# EAGLE board Thetis_RevD2_PCB (EAGLE 9.7.0)
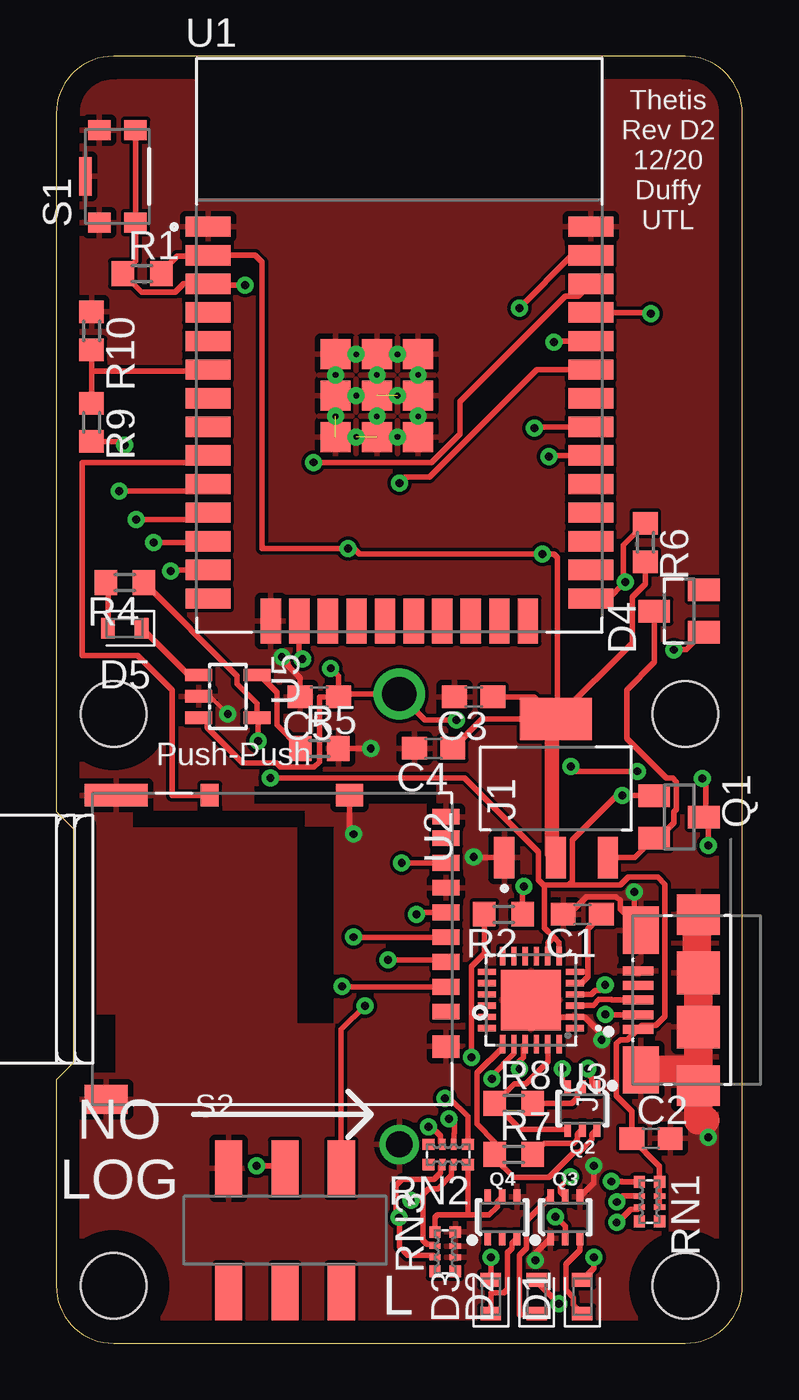
[diagram p0: board, top side]
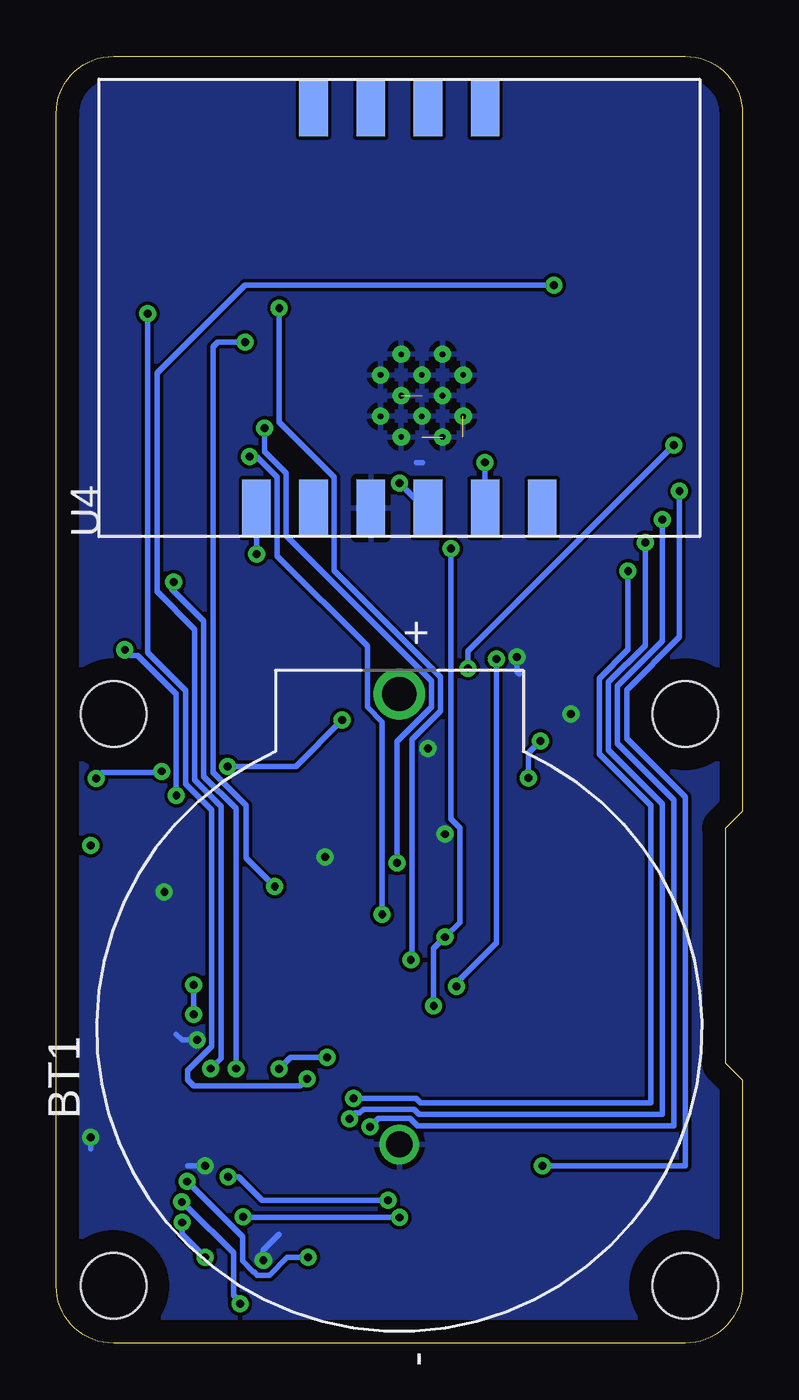
[diagram p1: board, bottom side, seen from below]

Size 30.48 x 57.15 mm. Coordinates in mm from the lower left corner, seen from the top.
Outline: 0,2.54 arc90 2.54,0 27.94,0 arc90 30.48,2.54 30.48,54.61 arc90 27.94,57.15 2.54,57.15 arc90 0,54.61 0,23.62 0.76,22.86 0.76,12.45 0,11.68 0,2.54
Copper layers (1*16): Top 0.035mm / dielectric 1.5mm / Bottom 0.035mm
Design rules "default": minimum track width 6mil, minimum drill 0.35mm, track to track 6mil, track to pad 6mil, pad to pad 6mil, via to via 6mil, smd to smd 6mil, copper to edge 40mil, drill to drill 6mil, minimum pad ring 10mil, minimum via ring 8mil, stop-mask expansion 4mil, vias tented up to drill 0mil, thermal gap 10mil
Net classes: 0 default: width 0.178 mm; 2 lowpower: width 0.305 mm, drill 0.483 mm
Holes 2.92 mm at 2.54,27.94 27.94,27.94 27.94,2.54 2.54,2.54
tKeepout: area 0.2,25.6 to 4.8,30.2; area 25.6,25.6 to 30.2,30.2; area 25.6,0.2 to 30.2,4.8; area 0.2,0.2 to 4.8,4.8
bKeepout: area 0.2,25.6 to 4.8,30.2; area 25.6,25.6 to 30.2,30.2; area 25.6,0.2 to 30.2,4.8; area 0.2,0.2 to 4.8,4.8

## Footprints (pad centres in the part's own frame; a part is rotated, then mirrored left to right if it is on the bottom)
BAT_BS-2450 = drill 1.52: + 14.86,0 | drill 1.17: - -5.14,0
C0603 = smd 1.1 x 1: 1 -0.85,0; 2 0.85,0
LEDC1608X65N = smd 0.612 x 0.912: A 0.75,0; C -0.75,0
SOT23 = smd 1 x 1.4: 1 -0.95,-1.1; 2 0.95,-1.1; 3 0,1.1
HRS_DM3AT-SF-PEJM5 = smd 0.7 x 1.2: 1 3.2,0; 2 2.1,0; 3 1,0; 4 -0.1,0; 5 -1.2,0; 6 -2.3,0; 7 -3.4,0; 8 -4.5,0; SWB -5.45,0 | smd 1 x 1.2: P1 -6.4,-4.3; P4 4.75,0 | smd 1 x 2.8: P2 -6.4,-14.65 | smd 1.3 x 1.9: P3 7.1,-15.1 | smd 1 x 0.8: SWA -6.4,-10.5
AMPHENOL_10118192-0001LF = smd 0.4 x 1.35: 1 -1.3,0; 2 -0.65,0; 3 0,0; 4 0.65,0; 5 1.3,0 | smd 2.1 x 1.6: SH1 -3.1,-0.125; SH2 3.1,-0.125 | smd 1.8 x 1.9: SH3 -3.8,-2.675; SH6 3.8,-2.675 | smd 1.9 x 1.9: SH4 -1.2,-2.675; SH5 1.2,-2.675
SC70-6 = smd 0.3 x 0.66: 1 -0.65,-0.92; 2 0,-0.92; 3 0.65,-0.92; 4 0.65,0.92; 5 0,0.92; 6 -0.65,0.92
R0603 = smd 1 x 1.1: 1 -0.85,0; 2 0.85,0
EXB28V = smd 0.525 x 0.5: 1 -0.875,-0.45; 4 0.875,-0.45; 5 0.875,0.45; 8 -0.875,0.45 | smd 0.25 x 0.5: 2 -0.25,-0.45; 3 0.25,-0.45; 6 0.25,0.45; 7 -0.25,0.45
SW_KMR221GLFS = smd 0.9 x 1: 1 -2.05,0.8; 2 -2.05,-0.8; 3 2.05,-0.8; 4 2.05,0.8 | smd 1.7 x 0.55: 5 0,1.425
SW_JS202011SCQN = smd 1.2 x 2.5: 1 -2.5,-2.75; 2 0,-2.75; 3 2.5,-2.75; 4 -2.5,2.75; 5 0,2.75; 6 2.5,2.75
MODULE_ESP32-WROOM-32E_(16MB) = smd 2 x 0.9: 1 -8.5,5.26; 2 -8.5,3.99; 3 -8.5,2.72; 4 -8.5,1.45; 5 -8.5,0.18; 6 -8.5,-1.09; 7 -8.5,-2.36; 8 -8.5,-3.63; 9 -8.5,-4.9; 10 -8.5,-6.17; 11 -8.5,-7.44; 12 -8.5,-8.71; 13 -8.5,-9.98; 14 -8.5,-11.25; 25 8.5,-11.25; 26 8.5,-9.98; 27 8.5,-8.71; 28 8.5,-7.44; 29 8.5,-6.17; 30 8.5,-4.9; 31 8.5,-3.63; 32 8.5,-2.36; 33 8.5,-1.09; 34 8.5,0.18; 35 8.5,1.45; 36 8.5,2.72; 37 8.5,3.99; 38 8.5,5.26 | smd 0.9 x 2: 15 -5.715,-12.25; 16 -4.445,-12.25; 17 -3.175,-12.25; 18 -1.905,-12.25; 19 -0.635,-12.25; 20 0.635,-12.25; 21 1.905,-12.25; 22 3.175,-12.25; 23 4.445,-12.25; 24 5.715,-12.25 | smd 1.33 x 1.33: 39_1 -2.835,-0.405; 39_2 -1,-0.405; 39_3 0.835,-0.405; 39_4 -2.835,-2.24; 39_5 -1,-2.24; 39_6 0.835,-2.24; 39_7 -2.835,-4.075; 39_8 -1,-4.075; 39_9 0.835,-4.075 | drill 0.25 pad 0.3: 39_10 -1.917,-0.405; 39_11 -0.083,-0.405; 39_12 -2.835,-1.323; 39_13 -1,-1.323; 39_14 0.835,-1.323; 39_15 -1.917,-2.24; 39_16 -0.083,-2.24; 39_17 -2.835,-3.158; 39_18 -1,-3.158; 39_19 0.835,-3.158; 39_20 -1.917,-4.075; 39_21 -0.083,-4.075
SOT230P700X180-4N = smd 1.86 x 0.9: 1 -3.075,2.3; 2 -3.075,0; 3 -3.075,-2.3 | smd 1.86 x 3.19: 4 3.075,0
QFN50P400X400X80-25N = smd 0.81 x 0.26: 1 -1.955,1.25; 2 -1.955,0.75; 3 -1.955,0.25; 4 -1.955,-0.25; 5 -1.955,-0.75; 6 -1.955,-1.25; 13 1.955,-1.25; 14 1.955,-0.75; 15 1.955,-0.25; 16 1.955,0.25; 17 1.955,0.75; 18 1.955,1.25 | smd 0.26 x 0.81: 7 -1.25,-1.955; 8 -0.75,-1.955; 9 -0.25,-1.955; 10 0.25,-1.955; 11 0.75,-1.955; 12 1.25,-1.955; 19 1.25,1.955; 20 0.75,1.955; 21 0.25,1.955; 22 -0.25,1.955; 23 -0.75,1.955; 24 -1.25,1.955 | smd 2.68 x 2.68: 25 0,0
ADAFRUIT-BNO055-BREAKOUT-SMD = smd 2.54 x 1.27: P$1 -8.89,6.35; P$2 -8.89,3.81; P$3 -8.89,1.27; P$4 -8.89,-1.27; P$5 -8.89,-3.81; P$6 -8.89,-6.35; P$7 8.89,3.81; P$8 8.89,1.27; P$9 8.89,-1.27; P$10 8.89,-3.81
SOT23-5L = smd 0.55 x 1.2: 1 -0.95,-1.3; 2 0,-1.3; 3 0.95,-1.3; 4 0.95,1.3; 5 -0.95,1.3

## Placement (x,y rotation side)
BT1  BS-2450  [BAT_BS-2450]  15.24,13.97 90 bottom
C1  1 uF  [C0603]  23.37,19.05 180 top
C2  1 uF  [C0603]  26.42,9.09 0 top
C3  10 uF  [C0603]  18.54,28.7 180 top
C4  10 uF  [C0603]  16.76,26.42 180 top
C5  10 uF  [C0603]  11.68,28.7 180 top
D1  GRN  [LEDC1608X65N]  23.37,2.07 90 top
D2  GRN  [LEDC1608X65N]  21.34,2.07 90 top
D3  GRN  [LEDC1608X65N]  19.3,2.07 90 top
D4  BAT400  [SOT23]  27.66,32.51 90 top
D5  ORG  [LEDC1608X65N]  3.05,31.75 180 top
J1  DM3AT-SF-PEJM5  [HRS_DM3AT-SF-PEJM5]  17.32,17.93 270 top
J2  10118192-0001LF  [AMPHENOL_10118192-0001LF]  25.84,15.24 90 top
Q1  DMG3414U-7  [SOT23]  27.66,23.37 270 top
Q2  MMBT2222N  [SC70-6]  23.37,10.41 180 top
Q3  MMBT2222N  [SC70-6]  22.61,5.59 0 top
Q4  MMBT2222N  [SC70-6]  19.81,5.59 0 top
R1  10k  [R0603]  3.81,47.5 0 top
R2  1k  [R0603]  19.86,19.05 180 top
R4  1k  [R0603]  3.05,33.78 180 top
R5  10.2k  [R0603]  11.68,26.42 0 top
R6  10k  [R0603]  26.16,35.56 270 top
R7  10k  [R0603]  20.32,8.38 0 top
R8  10k  [R0603]  20.32,10.65 0 top
R9  10k  [R0603]  1.57,40.89 270 top
R10  10k  [R0603]  1.57,44.96 270 top
RN1  1k  [EXB28V]  26.35,6.29 270 top
RN2  1k  [EXB28V]  17.41,8.38 180 top
RN3  10k  [EXB28V]  17.27,4.06 90 top
S1  KMR221GLFS  [SW_KMR221GLFS]  2.72,51.82 90 top
S2  JS202011SCQN  [SW_JS202011SCQN]  10.16,5.02 0 top
U1  ESP32-WROOM-32E_(16MB)  [MODULE_ESP32-WROOM-32E_(16MB)]  15.24,44.32 0 top
U2  AZ1117EH-5.0TRG1  [SOT230P700X180-4N]  22.2,24.64 90 top
U3  CP2104-F03-GM  [QFN50P400X400X80-25N]  21.08,15.24 180 top
U4  BNO055 Breakout  [ADAFRUIT-BNO055-BREAKOUT-SMD]  15.24,45.97 90 bottom
U5  MCP73831/OT  [SOT23-5L]  7.62,28.72 270 top

## Library data of the parts
BT1 = BS-2450; AVAILABILITY: Unavailable; DESCRIPTION: Battery Holder _Open_ Coin, 24.5mm 1 Cell PC Pin; MF: MPD; MP: BS-2450; PACKAGE: Non-Standard MPD; PRICE: None
C1-C5 = rcl; SPICEPREFIX: C
D1-D3 D5 = LED; CATEGORY: LED; COLOR: GREEN; DESCRIPTION: CHIP LED ROUND; SUB-CATEGORY: CHIP; TYPE: ROUND_TOP
D4 = diode
J1 = DM3AT-SF-PEJM5; AVAILABILITY: Unavailable; DESCRIPTION: DM3 RA SMT microSD memory card push/push; MF: Hirose; MP: DM3AT-SF-PEJM5; PACKAGE: None; PRICE: None
J2 = MicroUSB; MANUFACTURER: Amphenol; PARTREV: B; STANDARD: Manufacturer Recommendation
Q1 = Transistor; CATEGORY: Transistor; SUB-CATEGORY: MOSFET; TYPE: N-Channel
Q2-Q4 = SparkFun-DiscreteSemi-Poseidon-Edit; PROD_ID: TRANS-13337
R1 R2 R4-R10 = rcl; SPICEPREFIX: R
RN1-RN3 = resistor-dil-Poseidon-Edit; OC_FARNELL: unknown; OC_NEWARK: unknown
S1 = KMR221GLFS; MANUFACTURER: CnK
S2 = JS202011SCQN; MANUFACTURER: C&K
U1 = ESP32-WROOM-32E; MANUFACTURER: Espressif Systems; MAXIMUM_PACKAGE_HEIGHT: 3.25mm; PARTREV: 1.1; STANDARD: Manufacturer Recommendations
U2 = AZ1117EH-5.0TRG1; ARROW_ELECTRONICS-PURCHASE-URL: https://snapeda.com/shop?store=Arrow+Electronics&id=482930; AVAILABILITY: Good; DESCRIPTION: Linear Voltage Regulator IC 1 Output 1A SOT-223; DIGIKEY-PURCHASE-URL: https://snapeda.com/shop?store=DigiKey&id=482930; MF: Diodes Inc.; MOUSER-PURCHASE-URL: https://snapeda.com/shop?store=Mouser&id=482930; MP: AZ1117EH-5.0TRG1; PACKAGE: SOT-223 Diodes Inc.; PRICE: None
U3 = CP2104; MANUFACTORER: Silicon Labs; PARTREV: 1.0; STANDERD: IPC-7351B
U4 = EVE-ECAD-Library
U5 = adafruit - EVE Edit

## Nets
3.3V: C3.1 C4.1 J1.4 R1.2 R6.2 S2.6 U1.2 U2.2 U2.4 U4.P$1
3V3: U4.P$2
!DTR: Q2.4 R8.1 U3.23
!RTS: Q2.6 R7.1 U3.19
ACAL_LED: RN2.3 U1.11
BATT_MON: R9.1 R10.2 U1.6
ESP_RX: R2.1 U1.34
ESP_TX: U1.35 U3.20
GCAL_LED: RN2.2 U1.12
GND: BT1.- C1.2 C2.2 C3.2 C4.2 C5.2 J1.6 J1.P1 J1.P2 J1.P3 J1.P4 J1.SWB J2.5 J2.SH1 J2.SH2 J2.SH3 J2.SH4 J2.SH5 J2.SH6 Q3.1 Q3.4 Q4.4 R5.2 R10.1 RN3.2 RN3.3 RN3.4 S1.1 S1.4 S1.5 S2.4 U1.1 U1.15 U1.38 U1.39_1 U1.39_2 U1.39_3 U1.39_4 U1.39_5 U1.39_6 U1.39_7 U1.39_8 U1.39_9 U1.39_10 U1.39_11 U1.39_12 U1.39_13 U1.39_14 U1.39_15 U1.39_16 U1.39_17 U1.39_18 U1.39_19 U1.39_20 U1.39_21 U2.1 U3.2 U3.25 U4.P$3 U5.2
IO0: Q2.3 R6.1 U1.25
LOG_SELECT: S2.5 U1.10
MCAL_LED: RN2.1 U1.13
MISO: J1.7 U1.31
MOSI: J1.3 U1.37
N$2: C1.1 U3.5 U3.6
N$3: R2.2 U3.21
N$4: J2.3 U3.3
N$5: J2.2 U3.4
N$6: Q3.5 RN2.7 RN3.6
N$7: Q2.2 R8.2
N$8: D1.C Q3.3
N$9: Q2.5 R7.2
N$10: D1.A RN1.3
N$11: D2.A RN1.2
N$12: D2.C Q3.6
N$13: D4.3 Q1.2 U2.3
N$14: Q3.2 RN2.6 RN3.7
N$15: Q4.5 RN2.8 RN3.5
N$16: D3.C Q4.3
N$17: D3.A RN1.1
N$20: D5.A R4.2
N$21: D5.C U5.1
N$22: R5.1 U5.5
RST: Q2.1 R1.1 S1.2 S1.3 U1.3
SCK: J1.5 U1.30
SCL: U1.36 U4.P$5
SD_CD: J1.SWA U1.9
SD_CS: J1.2 U1.16
SDA: U1.33 U4.P$4
V_BATT: BT1.+ C5.1 Q1.3 R9.2 U5.3
V_USB: C2.1 D4.1 J2.1 Q1.1 R4.1 RN1.6 RN1.7 RN1.8 U3.7 U3.8 U5.4

## Tracks (layer width: path | path; a pad name or v marks a point on that pad's centre or on a via)
3.3V  (via drill 0.35)
  Top 0.254: R1.2 4.66,47.57 5.37,48.28 6.71,48.28 U1.2 8.84,48.31 9.14,48.01 9.14,35.28 v12.95,35.28 12.95,35.56 13.46,35.05 v21.59,35.05 22.1,35.05 22.26,34.89 22.26,27.78 | R6.2 26.16,33.7 25.59,33.13 25.59,31.1 22.26,27.78 | 22.26,27.78 U2.4 | C3.1 21.21,28.7 U2.4 | C4.1 18.91,27.71 U2.4 | J1.4 v13.21,18.03 | S2.6 12.66,13.93 v13.72,14.99
  Top 0.635: U2.4 22.02,27.53 22.02,21.75 U2.2
  Bottom 0.254: U4.P$1 v21.59,35.05 | v13.72,14.99 13.72,17.53 v13.21,18.03 12.55,18.69 12.55,22.88 12.95,23.28 v12.95,35.28
!DTR
  Top 0.254: Q2.4 20.63,9.49 R8.1 20.34,11.53 20.86,11.53 21.83,12.5 U3.23
!RTS
  Top 0.254: Q2.6 23.8,9.27 23.8,9.05 23.23,8.48 23,8.48 21.89,7.37 20.32,7.37 19.47,8.22 R7.1 19.47,8.95 18.69,9.73 18.69,12 19.83,13.15 U3.19
ACAL_LED  (via drill 0.35)
  Top 0.254: RN2.3 17.07,8.91 17.07,9.2 16.66,9.61 v16.54,9.61 | U1.11 6.43,36.58 v3.56,36.58
  Bottom 0.254: v3.56,36.58 3.56,31.18 5.55,29.19 5.55,26.63 3.05,24.13 3.05,9.65 14.43,9.65 14.76,9.99 16.16,9.99 v16.54,9.61
BATT_MON
  Top 0.254: R10.2 1.57,43.18 | 1.57,43.18 R9.1 | U1.6 6.69,43.18 1.57,43.18
ESP_RX  (via drill 0.35)
  Top 0.254: U1.34 22.15,44.5 v22.1,44.45 | R2.1 20.71,20.21 20.77,20.27 v20.77,20.28
  Bottom 0.254: v22.1,44.45 23.32,44.45 23.52,44.25 23.52,25.35 22.05,23.87 22.05,21.56 v20.77,20.28
ESP_TX  (via drill 0.35)
  Top 0.254: U1.35 26.36,45.77 v26.42,45.72 | v19.35,11.73 19.35,11.88 20.33,12.86 U3.20
  Bottom 0.254: v19.35,11.73 19.65,11.43 24.38,11.43 24.64,11.68 24.64,12.12 23.57,13.19 23.57,23.67 24.74,24.84 24.74,29 26.42,30.67 v26.42,45.72
GCAL_LED  (via drill 0.35)
  Top 0.254: U1.12 6.69,35.56 v4.32,35.56 | RN2.2 17.66,9.31 17.68,9.33 17.68,9.88 17.59,9.97 v17.45,9.97
  Bottom 0.254: v4.32,35.56 4.32,30.99 5.96,29.36 5.96,26.34 3.56,23.94 3.56,10.16 14.36,10.16 14.59,10.39 16.83,10.39 17,10.22 17.2,10.22 v17.45,9.97
GND  (via drill 0.35)  (3 unrouted)
  Top 0.178: U5.2 6.83,28.73 v7.62,27.94
  Top 0.254: 27.94,19.61 J2.SH6 | U3.25 21.84,14.48 23.02,14.48 U3.2 23.46,14.49 24.23,13.72 v24.23,13.46 | Q3.4 23.88,7.13 v23.88,7.87 | Q3.1 21.3,4.01 21.3,3.69 v21.28,3.68 | J2.SH3 28.51,9.59 v28.96,9.14 | C1.2 22.77,19.05 23.55,19.83 24.88,19.83 25.05,19.67 25.05,19.26 J2.SH2 25.68,18.62 v25.68,20.04 | U2.1 18.57,21.56 v18.54,21.59 | v13.97,26.42 R5.2 | J1.P1 13.02,22.79 v13.21,22.61 | v10.02,30.48 10.27,30.23 10.27,30.11 10.83,29.54 C5.2
  Top 1.27: J2.SH6 28.45,18.97 28.45,16.51 J2.SH5 J2.SH4 28.51,12.14 | 28.51,12.14 J2.SH3 28.51,9.91 28.83,9.91 | J2.SH1 28.51,12.14
  Bottom 0.254: v24.23,13.46 24.89,13.46 25.15,13.72 | v23.88,7.87 24.64,7.87 | 14.22,39.12 14.48,39.12 | v21.28,3.68 21.28,4.12 20.57,4.83 | v28.96,9.14 28.96,8.64 | v13.21,22.61 13.46,22.61 | 9.91,29.72 10.02,29.83 v10.02,30.48
  pour Top: -1.91,-2.67 32.64,-2.67 32.64,59.82 -1.91,59.82
  pour Bottom: -1.91,-2.67 32.64,-2.67 32.64,59.82 -1.91,59.82
IO0  (via drill 0.35)
  Top 0.254: Q2.3 22.49,11.56 v22.49,12.19 | v25.27,33.8 25.2,33.73 | 25.2,33.73 24.54,33.07 U1.25 | R6.1 25.2,35.45 25.2,33.73
  Bottom 0.254: v25.27,33.8 25.35,33.72 25.35,33.49 23.93,32.06 23.93,25.18 22.49,23.74 v22.49,12.19
LOG_SELECT  (via drill 0.35)
  Top 0.254: U1.10 6.43,37.85 v2.79,37.85 | v8.89,7.87 10.05,7.87 S2.5
  Bottom 0.254: v2.79,37.85 2.79,31.37 5.14,29.02 5.14,26.86 2.54,24.26 2.54,7.87 v8.89,7.87
MCAL_LED  (via drill 0.35)
  Top 0.254: U1.13 5.13,34.34 v5.08,34.29 | RN2.1 18.28,10.06 17.47,10.88 v17.27,10.88
  Bottom 0.254: v5.08,34.29 5.08,30.81 6.36,29.52 6.36,28.7 6.36,26.18 4.06,23.88 4.06,10.67 14.29,10.67 14.5,10.88 v17.27,10.88
MISO  (via drill 0.35)
  Top 0.254: U1.31 21.23,40.69 v21.23,40.64 | J1.7 v15.34,21.34
  Bottom 0.254: v21.23,40.64 21.23,39.6 20.27,38.64 20.27,35.87 13.82,29.42 13.82,28.24 15.34,26.72 v15.34,21.34
MOSI  (via drill 0.35)
  Top 0.254: U1.37 22.91,48.31 v20.57,45.97 | v14.73,17.02 17.23,17.02 J1.3
  Bottom 0.254: v20.57,45.97 20.57,40.91 18.14,38.47 18.14,34.31 13.41,29.59 13.41,28.07 14.69,26.8 14.69,17.06 v14.73,17.02
N$2
  Top 0.254: U3.6 23.62,16.49 | U3.5 23.36,15.99 23.62,16.26 23.62,16.49 | C1.1 24.22,19 23.62,18.4 23.62,16.49
N$3  (via drill 0.35)
  Top 0.254: R2.2 19.01,17.3 18.44,16.73 18.44,13.75 18.45,13.74 v18.45,12.7 | v20.58,12.18 20.58,12.54 20.74,12.7 20.74,13.19 U3.21
  Bottom 0.254: v18.45,12.7 20.07,12.7 v20.58,12.18
N$4
  Top 0.254: U3.3 23.05,15.01 23.86,15.01 24.11,15.26 24.66,15.26 24.68,15.24 J2.3
N$5  (via drill 0.35)
  Top 0.254: J2.2 24.4,14.59 v24.38,14.6 | U3.4 23.77,15.49 23.94,15.67 24.13,15.67 v24.38,15.92
  Bottom 0.254: v24.38,14.6 24.38,15.66 24.38,15.67 v24.38,15.92
N$6  (via drill 0.35)
  Top 0.254: 16.29,6.35 16.29,6.62 16.54,6.86 16.95,6.86 17.56,7.48 17.56,7.84 RN2.7 | 16.29,6.35 16.29,4.56 16.46,4.4 16.74,4.4 RN3.6 | Q3.5 22.39,6.73 22.39,6.95 22.82,7.39 v22.84,7.39 | v15.75,6.35 16.29,6.35
  Bottom 0.254: v15.75,6.35 21.34,6.35 22.37,7.39 v22.84,7.39
N$7
  Top 0.254: Q2.2 23.15,11.11 23.15,10.89 22.91,10.65 R8.2
N$8
  Top 0.254: D1.C 22.98,1.71 22.98,2.03 22.63,2.37 22.63,3.5 23.26,4.12 Q3.3
N$9
  Top 0.254: Q2.5 23.15,9.27 23.15,9.05 22.98,8.88 21.67,8.88 R7.2
N$10  (via drill 0.35)
  Top 0.254: RN1.3 25.82,5.96 25.53,5.96 25.17,5.59 25.12,5.59 v24.89,5.36 | v23.88,3.81 23.88,3.33 D1.A
  Bottom 0.254: v23.88,3.81 24.89,4.83 v24.89,5.36
N$11  (via drill 0.35)
  Top 0.254: RN1.2 25.17,6.54 v24.9,6.27 | v22.32,1.75 21.34,2.74 D2.A
  Bottom 0.254: v24.9,6.27 24.65,6.02 24.62,6.02 22.61,4.01 22.61,2.14 22.32,1.85 v22.32,1.75
N$12
  Top 0.254: D2.C 21.28,1.27 20.57,1.27 20.57,3.9 20.89,4.22 20.89,5.44 Q3.6
N$13
  Top 0.254: U2.3 25.71,21.56 Q1.2 26.74,22.42 27.43,23.11 27.43,23.59 27.54,23.7 27.54,24.93 27.38,25.1 27.1,25.1 25.34,26.86 25.34,29.02 26.56,30.25 D4.3
N$14  (via drill 0.35)
  Top 0.254: RN3.7 16.73,3.91 15.61,3.91 15.24,4.28 v15.24,5.59 | v15.24,5.59 v15.23,5.58 | v15.24,5.59 15.09,5.74 15.09,7 15.36,7.27 16.78,7.27 17.07,7.57 17.07,7.85 RN2.6 | Q3.2 22.61,5.18 v22.17,5.62
  Bottom 0.254: v15.23,5.58 v15.24,5.59 22.14,5.59 v22.17,5.62
N$15
  Top 0.254: RN3.5 16.82,5.59 16.93,5.7 18.29,5.7 | Q4.5 19.59,6.29 19.59,6.06 19.22,5.7 18.29,5.7 | RN2.8 18.28,5.7 18.29,5.7
N$16
  Top 0.254: Q4.3 20.24,4.45 20.24,4.22 20.08,4.06 20.07,4.06 20.04,4.03 20.04,2.4 19.88,2.24 19.3,2.24 D3.C
N$17  (via drill 0.35)
  Top 0.254: RN1.1 25.13,7.16 25.12,7.18 v24.66,7.18 | v19.3,3.81 D3.A
  Bottom 0.254: v24.66,7.18 22.21,4.72 22.21,3.65 21.73,3.17 21.7,3.17 21.55,3.03 21.01,3.03 20.23,3.81 v19.3,3.81
N$20
  Top 0.254: D5.A 2.3,33.68 R4.2
N$21
  Top 0.178: U5.1 6.3,29.65 5.9,29.65
  Top 0.254: D5.C 5.9,29.65
N$22
  Top 0.254: R5.1 9.8,27.45 9.8,28.91 9.03,29.68 U5.5
RST  (via drill 0.35)
  Top 0.254: Q2.1 23.8,11.55 23.8,11.78 23.62,11.96 v23.62,12.2 | S1.3 S1.2 3.52,48.05 R1.1 3.79,46.67 5.28,46.67 5.65,47.04 U1.3 6.79,46.99 v8.38,46.99
  Bottom 0.254: v8.38,46.99 22.1,46.99 26.01,43.08 26.01,33.38 24.33,31.7 24.33,25.01 23.16,23.84 23.16,12.65 v23.62,12.2
SCK  (via drill 0.35)
  Top 0.254: U1.30 21.94,39.42 v21.89,39.37 | v16,19.05 16.08,19.13 J1.5
  Bottom 0.254: v21.89,39.37 21.58,39.37 20.68,38.47 20.68,34.97 16.66,30.95 16.66,28.24 16,27.59 v16,19.05
SCL  (via drill 0.35)
  Top 0.254: U1.36 23.2,46.5 22.62,46.5 17.93,41.81 17.93,40.38 16.67,39.12 v11.43,39.12
  Bottom 0.254: v11.43,39.12 U4.P$5
SD_CD
  Top 0.254: U1.9 6.43,39.12 1.14,39.12 1.14,30.54 3.62,30.54 5.14,29.02 5.14,24.33 J1.SWA
SD_CS  (via drill 0.35)
  Top 0.254: J1.2 12.71,15.83 v12.7,15.84 | U1.16 10.79,30.38 v10.93,30.38
  Bottom 0.254: v12.7,15.84 12.7,16 10.93,17.77 v10.93,30.38
SDA  (via drill 0.35)
  Top 0.254: v15.24,38.2 15.49,38.46 16.58,38.46 21.36,43.23 U1.33
  Bottom 0.254: v15.24,38.2 14.12,37.08 U4.P$4
V_BATT  (via drill 0.35)
  Top 0.178: U5.3 6.34,27.75 6.71,27.75
  Top 0.254: C5.1 12.66,28.83 BT1.+ 16.38,27.69 17.77,27.69 v17.78,27.67 | R9.2 2.88,40.04 v3.05,39.88 | v12.19,29.97 12.53,29.63 C5.1 | C5.1 11.68,28.7 11.68,25.82 11.45,25.59 9.96,25.59 9.78,25.77 8.28,25.77 6.71,27.34 6.71,27.75 | Q1.3 28.86,23.27 | 28.86,23.27 28.96,23.18 v28.96,22.1 | v28.7,25.09 28.86,24.93 28.86,23.27 | v22.86,25.62 23.08,25.4 v25.8,25.4
  Bottom 0.254: v3.05,39.88 12.19,30.73 v12.19,29.97 | v28.7,25.09 28.45,25.34 25.87,25.34 v25.8,25.4 | v17.78,27.67 19.83,25.62 v22.86,25.62
V_USB  (via drill 0.35)
  Top 0.254: RN1.6 RN1.7 RN1.8 26.8,7.86 C2.1 25.57,10.29 24.89,10.97 24.89,13.31 25.05,13.47 25.37,13.47 J2.1 26.01,14.11 26.63,14.11 27.04,14.52 27.04,20.37 26.71,20.7 25.41,20.7 25.06,20.35 22.76,20.35 | R4.1 8.04,29.64 8.04,29.28 8.92,28.4 U5.4 8.97,27.73 v8.97,26.75 | 22.76,20.35 21.63,20.35 | 22.76,20.35 22.93,20.52 22.93,22.35 24.89,24.32 v25.15,24.32 Q1.1 | 21.63,20.35 21.42,20.57 21.42,21.82 18.13,25.11 v9.51,25.11 | U3.8 21.83,17.77 22.1,18.03 | 22.1,18.03 22.33,17.8 U3.7 | 22.1,18.03 21.86,18.27 21.85,18.27 21.69,18.43 21.69,20.3 21.63,20.35 | D4.1 28,30.8 v27.43,30.8
  Bottom 0.254: v27.43,30.8 27.18,30.54 26.86,30.54 25.15,28.83 v25.15,24.32 | v8.97,26.75 9.51,26.21 v9.51,25.11

## Text on the board
tSilk: Thetis / Rev D2 / 12/20 / Duffy / UTL | Push-Push | NO / LOG | L